# Altium PCB APD_part.PcbDoc
Units mm, origin at the board's own origin, x right, y up, seen from the top; angles counter-clockwise.
Board outline 50 x 65 mm, 4 copper layers (Top Layer, Layer 1, Layer 2, Bottom Layer), stack 0.603 mm thick; 76 components, 51 nets, 248 pads, 93 vias.
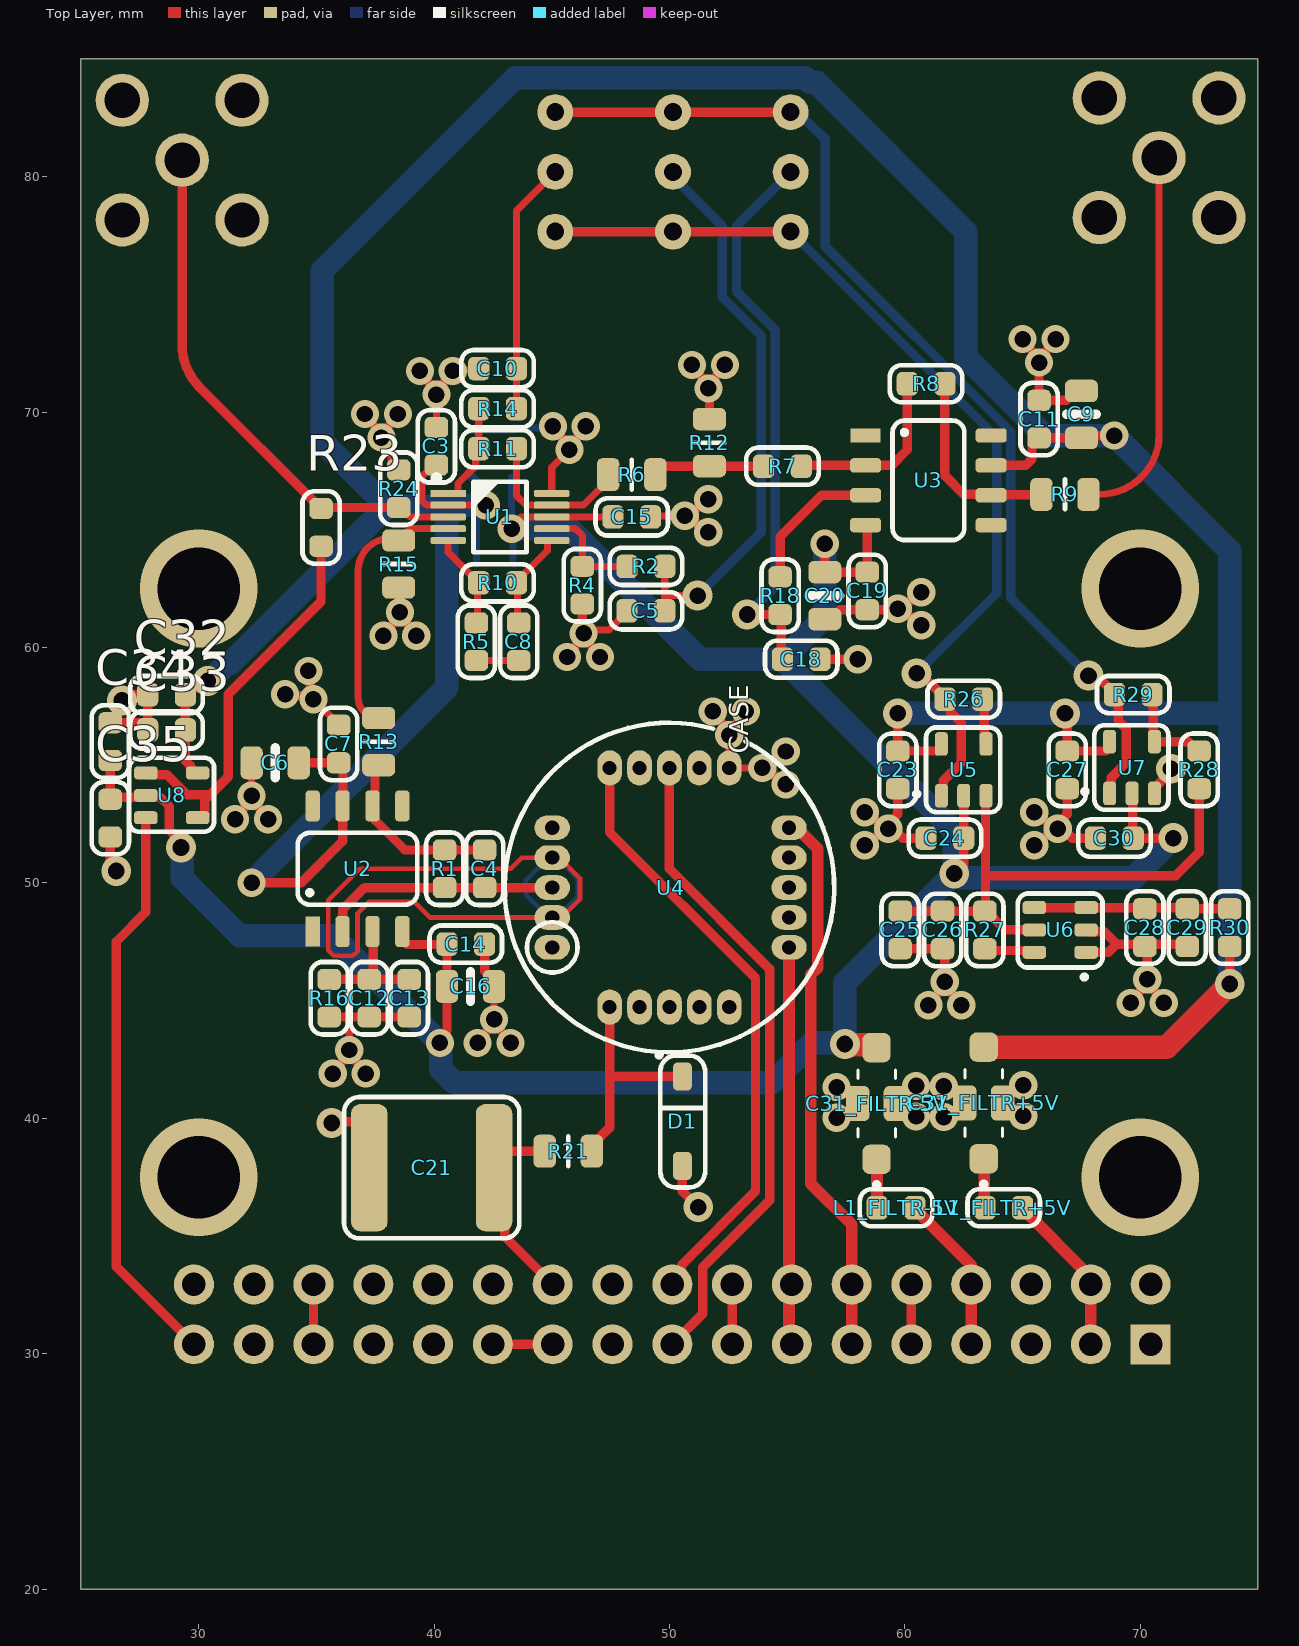
[diagram p0: Top Layer view]
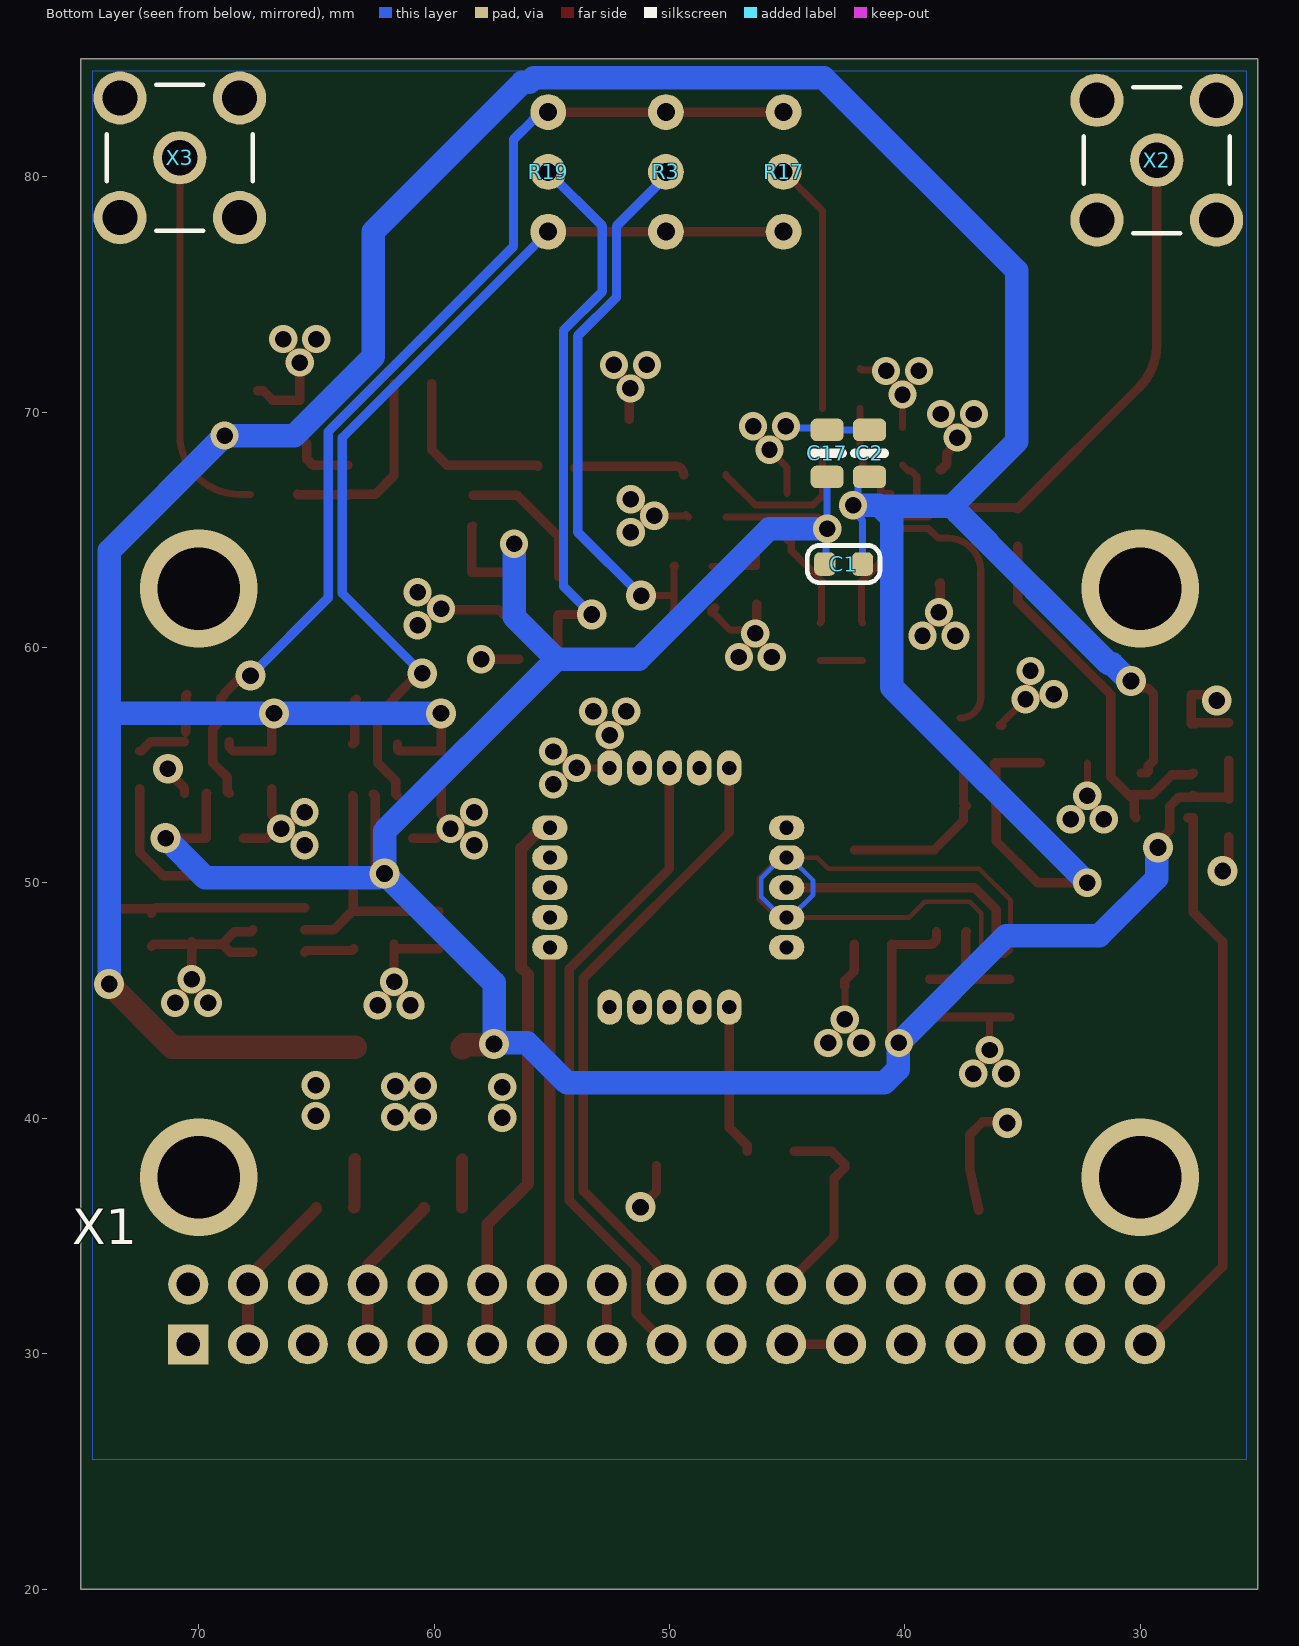
[diagram p1: Bottom Layer view, seen from below]
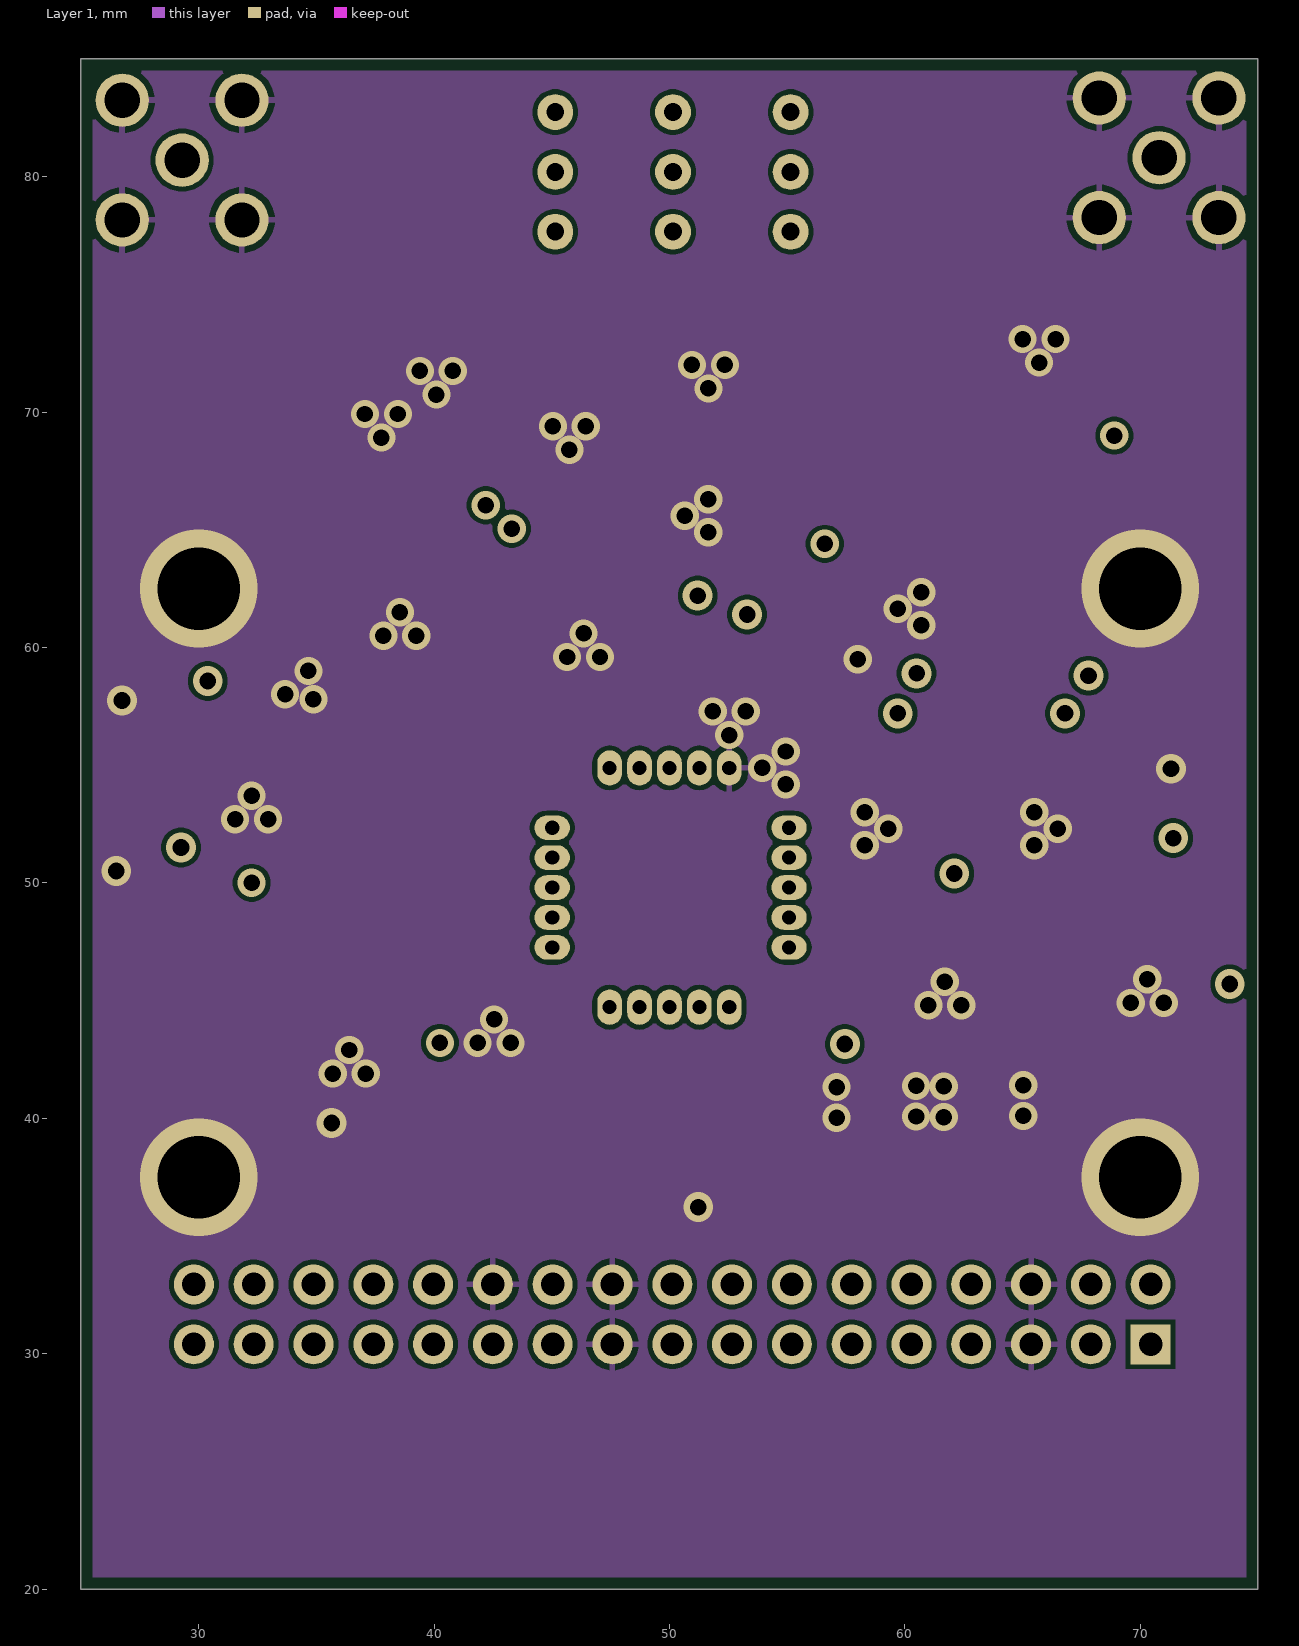
[diagram p2: Layer 1]
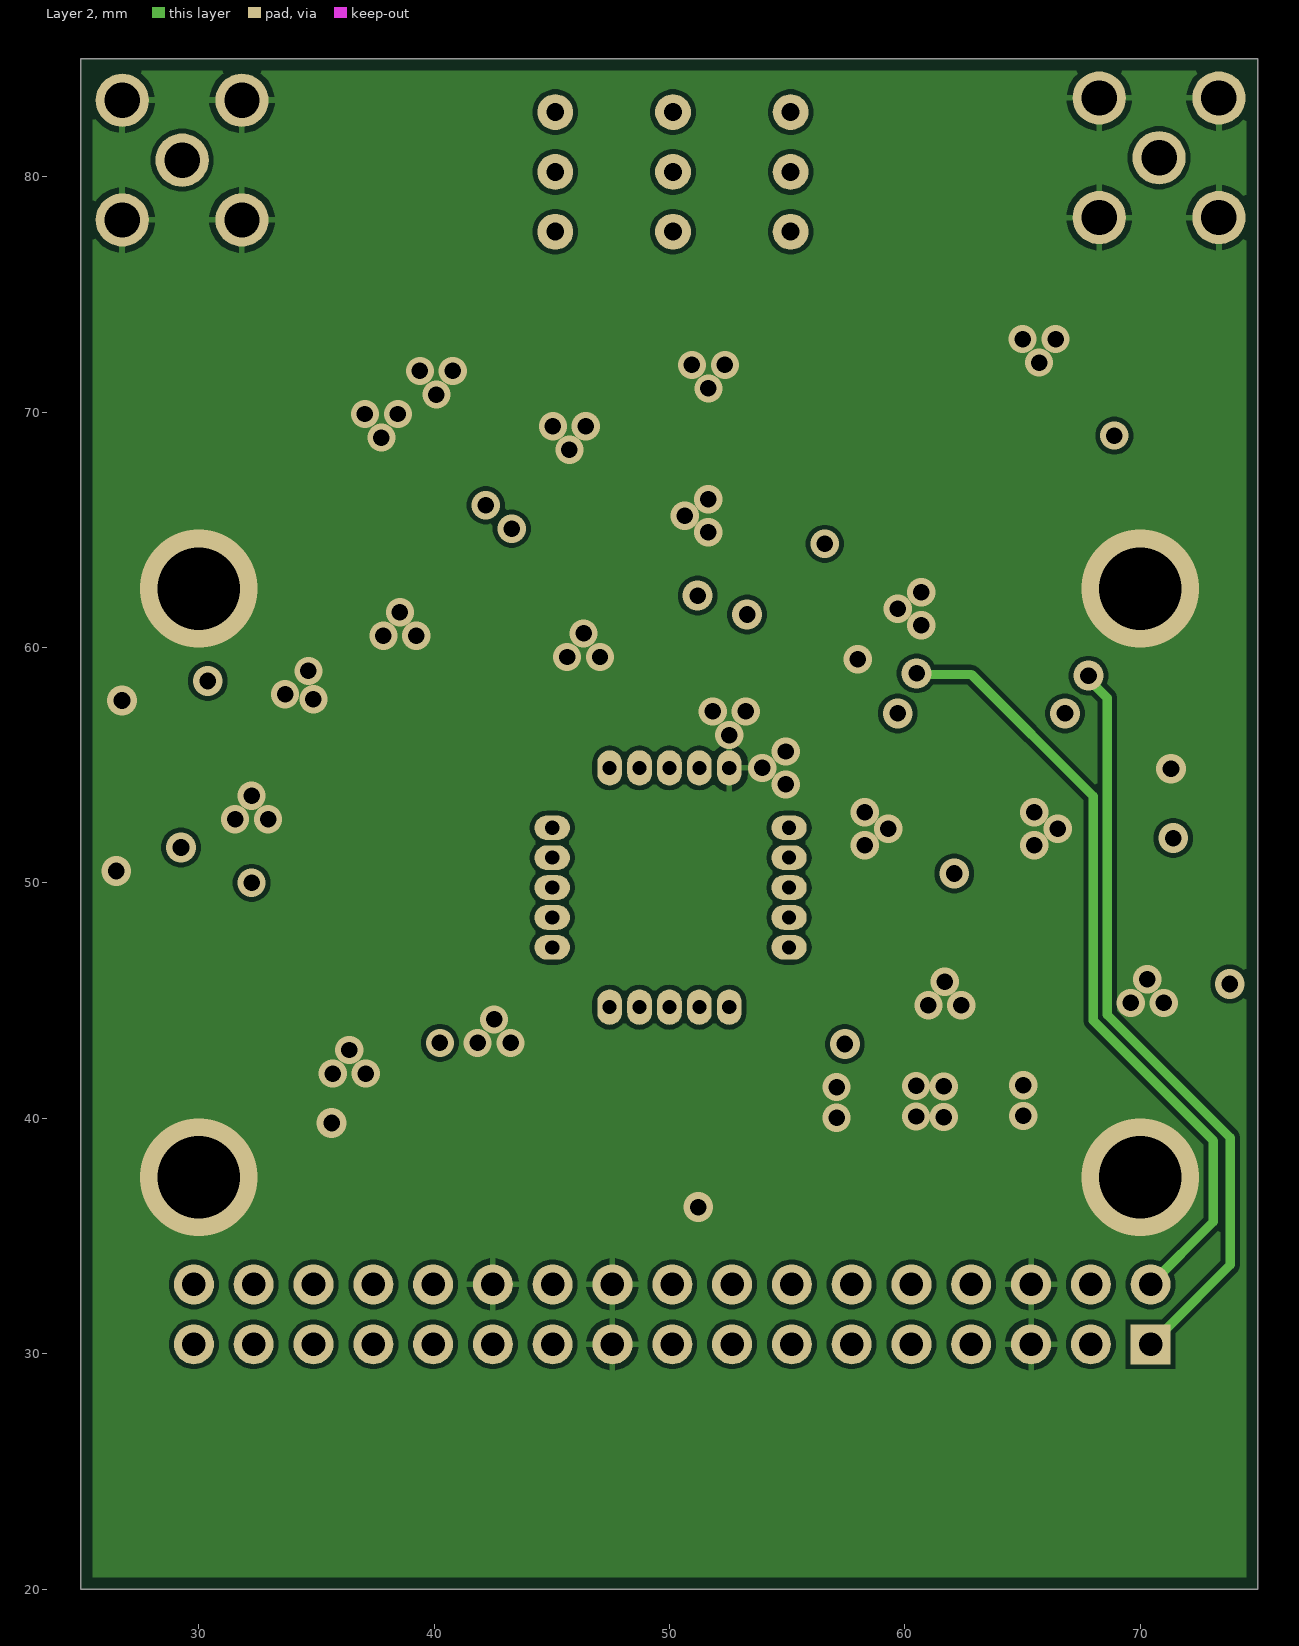
[diagram p3: Layer 2]
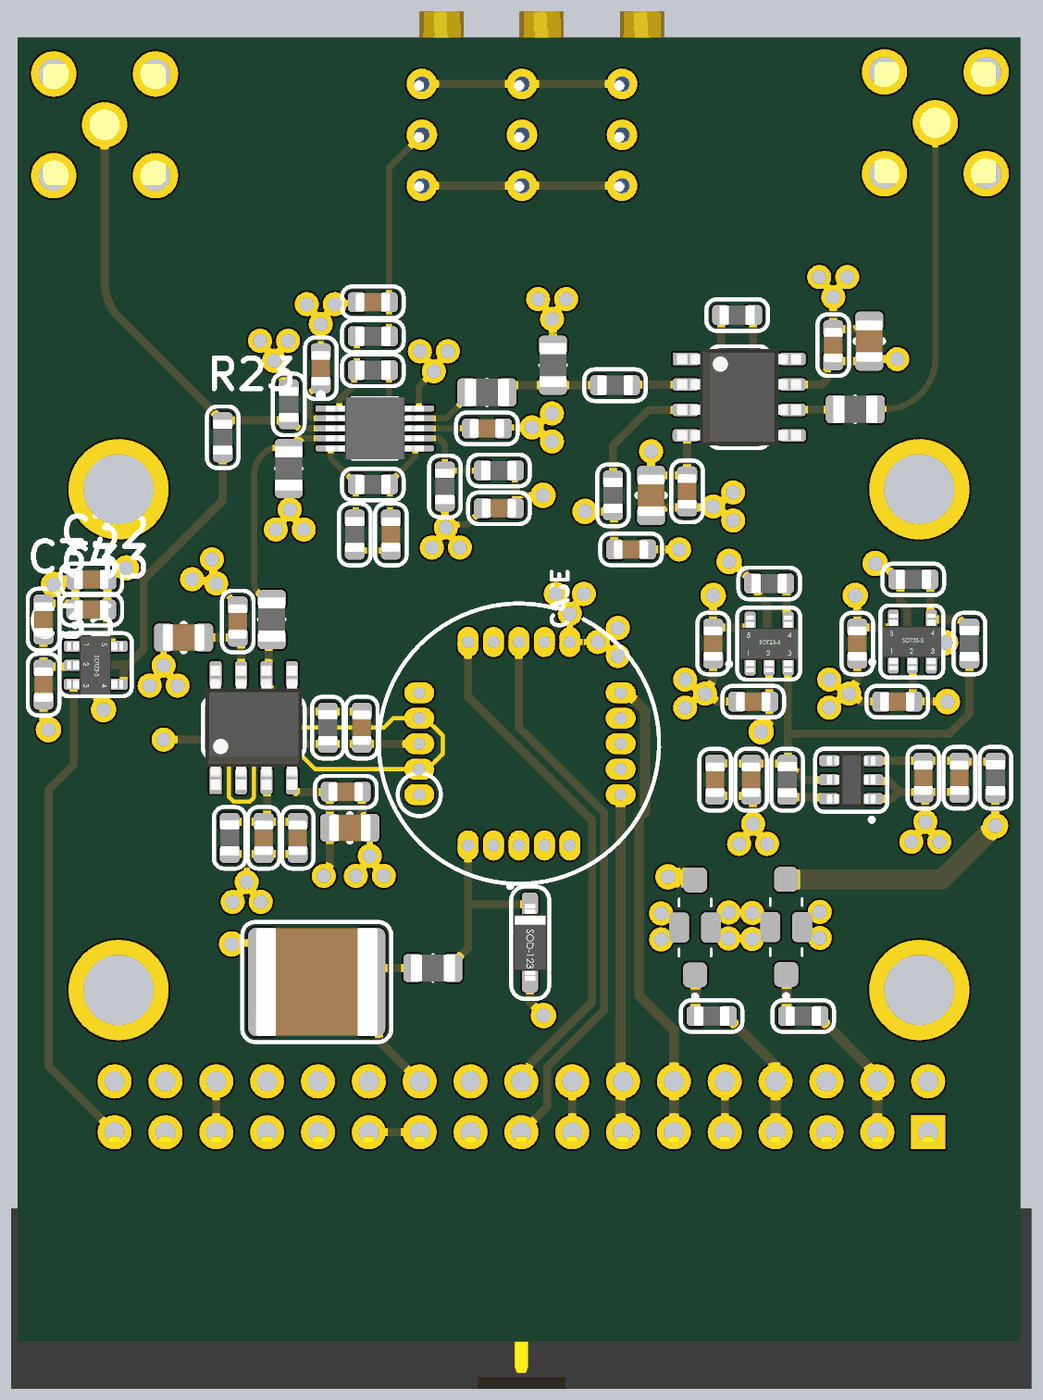
[diagram p4: 3D render of the assembled board from above, using the file's embedded part models]
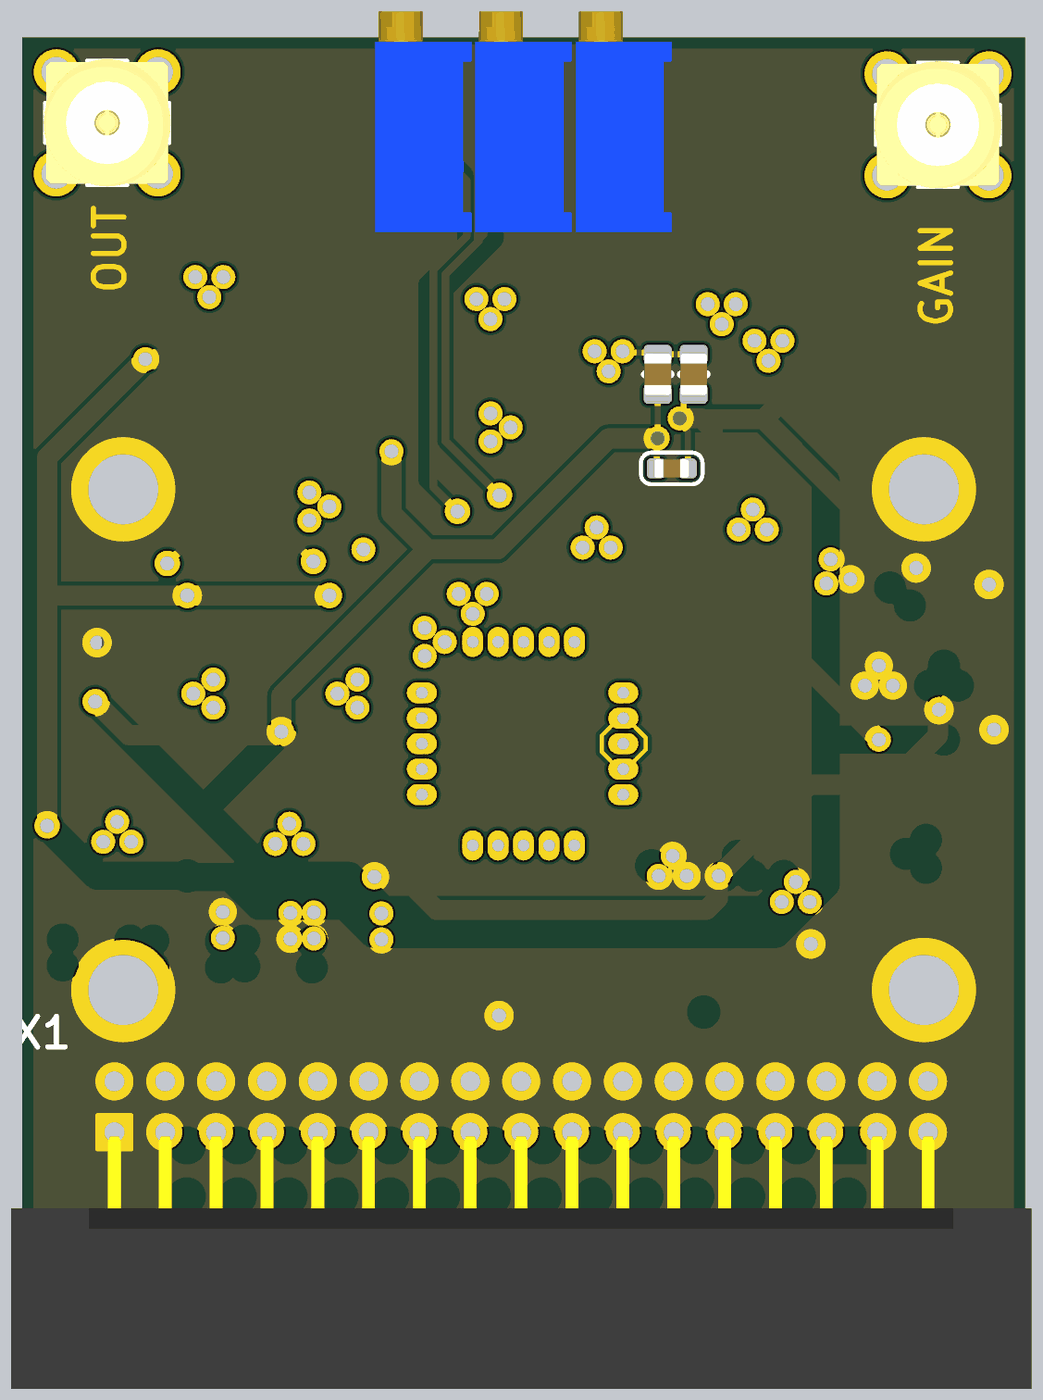
[diagram p5: 3D render of the assembled board from below, using the file's embedded part models]

## Layer stack, top to bottom
Top Solder: solder mask 0.0102, Solder Resist, Dk 3.5
Top Layer: signal copper 0.0356
Dielectric 2: prepreg 0.0711, PP-006, Dk 4.1
Layer 1: signal copper 0.035
Dielectric 1: dielectric 0.32, FR-4, Dk 4.8
Layer 2: signal copper 0.035
Dielectric 3: prepreg 0.0711, PP-006, Dk 4.1
Bottom Layer: signal copper 0.0356
Bottom Solder: solder mask 0.0102, Solder Resist, Dk 3.5

## Board outline
25,20 25,85 75,85 75,20

## Design rules (kind name [scope] priority, off if disabled: settings)
Clearance [All] p1: gap=0.2 ignorepadtopadclearanceinfootprint=FALSE
PlaneClearance [InNet('No Net') And OnLayer('Layer 2')] p1: clearance=0
PlaneConnect [All] p1: pad.planeconnectstyle=Relief pad.reliefexpansion=0.508 pad.reliefentries=4 pad.reliefconductorwidth=0.254 pad.reliefairgap=0.254 via.planeconnectstyle=Direct via.reliefexpansion=0.508 via.reliefentries=4 via.reliefconductorwidth=0.254 via.reliefairgap=0.254
PolygonConnect [All] p1: thpad.connectstyle=Relief thpad.reliefconductorwidth=0.254 thpad.reliefentries=4 thpad.polygonreliefangle="90 Angle" thpad.airgapwidth=0.254 smdpad.connectstyle=Relief smdpad.reliefconductorwidth=0.254 smdpad.reliefentries=4 smdpad.polygonreliefangle="90 Angle" smdpad.airgapwidth=0.254 via.connectstyle=Direct via.reliefconductorwidth=0.254 via.reliefentries=4 via.polygonreliefangle="90 Angle" via.airgapwidth=0.254
RoutingVias [All] p1: holewidth=0.711 width=1.27 viastyle="Through Hole" minholewidth=0.711 minwidth=1.27 maxholewidth=0.711 maxwidth=1.27
SolderMaskExpansion [All] p1: expansion=0.102 istentingtop=FALSE
Width [All] p1: maxlimit=5 minlimit=0.2 preferedwidth=0.3
28 further rules are at their usual default settings.

## Classes and differential pairs
component class BUF: C32 C33 C34 C35 U8
component class main: C21 D1 R21 R23 R24 U4 X1 X2 X3
component class AMP: C1 C2 C3 C4 C5 C6 C7 C8 C9 C10 C11 C12 C13 C14 C15 C16 C17 C18 C19 C20 R1 R2 R3 R4 R5 R6 R7 R8 R9 R10 R11 R12 R13 R14 R15 R16 R17 R18 R19 U1 U2 U3
channel class supply_filter: FILTR+5V FILTR-5V
component class REF: C23 C24 C25 C26 C27 C28 C29 C30 R26 R27 R28 R29 R30 U5 U6 U7
component class FILTR-5V: C31_FILTR-5V L1_FILTR-5V
component class FILTR+5V: C31_FILTR+5V L1_FILTR+5V

## Components (designator, comment, footprint, x,y, rotation, side; value= is the part's Value field where it differs from the comment)
C1 "CX0603MRX7R6BB104" CAP_0603 42.6,63.544 r0 bottom
C2 "2.2u" CAP_0805 41.5,68.244 r270 bottom
C3 "100n" CAP_0603 40.1,68.544 r270 top
C4 "0.5p" CAP_0603 42.15,50.6 r90 top
C5 "100n" CAP_0603 49,61.556 r180 top
C6 "6.8u" CAP_0805 33.25,55.1 r180 top
C7 "100n" CAP_0603 35.95,55.9 r90 top
C8 "15p" CAP_0603 43.6,60.244 r270 top
C9 "6.8u" CAP_0805 67.5,69.9 r90 top
C10 "100n" CAP_0603 42.7,71.844 r180 top
C11 "100n" CAP_0603 65.7,69.7 r90 top
C12 "100n" CAP_0603 37.25,45.1 r90 top
C13 "100p" CAP_0603 38.95,45.1 r90 top
C14 "100n" CAP_0603 41.35,47.4 r0 top
C15 "100n" CAP_0603 48.4,65.544 r180 top
C16 "6.8u" CAP_0805 41.55,45.6 r0 top
C17 "2.2u" CAP_0805 43.3,68.244 r270 bottom
C18 "100n" CAP_0603 55.6,59.5 r0 top
C19 "100n" CAP_0603 58.4,62.4 r270 top
C20 "6.8u" CAP_0805 56.6,62.2 r270 top
C21 "1206 100n 630V" CAP_2220 39.9,37.9 r180 top
C23 "100n" CAP_0603 59.7,54.8 r270 top
C24 "100n" CAP_0603 61.7,51.9 r180 top
C25 "1u" CAP_0603 59.8,48 r90 top
C26 "100n" CAP_0603 61.6,48 r90 top
C27 "100n" CAP_0603 66.9,54.8 r270 top
C28 "100n" CAP_0603 70.2,48.1 r90 top
C29 "2.2u" CAP_0603 72,48.1 r90 top
C30 "100n" CAP_0603 68.9,51.9 r180 top
C31_FILTR+5V "NFM41PC155B1E3L" FIL_NFM41PC155B1E3L 63.35,40.65 r90 top (schematic designator C31)
C31_FILTR-5V "NFM41PC155B1E3L" FIL_NFM41PC155B1E3L 58.8,40.625 r90 top (schematic designator C31)
C32 "1u" CAP_0603 28.637,57.994 r180 top
C33 "100n" CAP_0603 28.637,56.494 r180 top
C34 "100n" CAP_0603 26.25,56 r90 top
C35 "1u" CAP_0603 26.25,52.75 r270 top
D1 "P4SMA400A" SOD-123 50.55,39.875 r90 top
L1_FILTR+5V "BLM18SG700TN1D" RES_0603 64.2,36.2 r0 top (schematic designator L1)
L1_FILTR-5V "BLM18SG700TN1D" RES_0603 59.625,36.2 r0 top (schematic designator L1)
R1 "10k" RES_0603 40.45,50.6 r90 top
R2 "3.9k" RES_0603 49,63.444 r180 top
R3 "3296X" 3296X 50.15,80.2 r90 bottom
R4 "51" RES_0603 46.3,62.644 r90 top
R5 "510" RES_0603 41.8,60.244 r90 top
R6 "51" RES_0805 48.4,67.344 r0 top
R7 "390" RES_0603 54.8,67.7 r0 top
R8 "390" RES_0603 60.9,71.2 r0 top
R9 "51" RES_0805 66.8,66.5 r0 top
R10 "510" RES_0603 42.7,62.744 r180 top
R11 "510" RES_0603 42.7,68.444 r0 top
R12 "51" RES_0805 51.7,68.7 r270 top
R13 "51" RES_0805 37.65,56 r90 top
R14 "3.9k" RES_0603 42.7,70.144 r180 top
R15 "51" RES_0805 38.5,63.544 r90 top
R16 "10k" RES_0603 35.55,45.1 r90 top
R17 "3296X" 3296X 45.15,80.2 r90 bottom
R18 "20k" RES_0603 54.7,62.2 r90 top
R19 "3296X" 3296X 55.15,80.2 r90 bottom
R21 "10K" RES_0805 45.7,38.6 r180 top
R23 "51" RES_0603 35.2,65.1 r90 top
R24 "51" RES_0603 38.5,66.744 r270 top
R26 "10k" RES_0603 62.5,57.8 r180 top
R27 "1k" RES_0603 63.4,48 r90 top
R28 "10k" RES_0603 72.5,54.8 r90 top
R29 "10k" RES_0603 69.7,58 r180 top
R30 "1k" RES_0603 73.8,48.1 r270 top
U1 "VCA824IDGS" VSSOP10 42.8,65.544 r0 top
U2 "OPA847" SO8-150 36.75,50.6 r90 top
U3 "OPA656U" SO8-150 61,67.1 r0 top
U4 "C30659" C30659 50,49.8 r90 top
U5 "OPA188AIDBV" sot235 62.5,54.8 r0 top
U6 "REF3225" SOT236 66.6,48 r90 top
U7 "OPA188AIDBV" sot235 69.65,54.9 r0 top
U8 "AD8065ART" sot235 28.857,53.718 r270 top
X1 "?" BH-34 70.44,32.94 r180 bottom
X2 "Model" SMA_V 29.3,80.7 r180 bottom
X3 "Model" SMA_V 70.8,80.8 r180 bottom

## Footprints (in the part's own frame and the unit in brackets; to place one, negate y for a bottom-side part, rotate by r counter-clockwise, add the part's x,y. Pads: shape width x height; smd on the part's side, far side on the other; paste and mask are expansions set on the pad)
3296X [mil] "Потенциометр"
  round 60 hole 30: 1(-100,0) 2(0,0) 3(100,0)
  body extent -192,-100 242,89, height 395
BH-34 [mm]
  rect 1.7x1.7 hole 1: 1(0,-2.54)
  round 1.7 hole 1: 2(0,0) 3(2.54,-2.54) 4(2.54,0) 5(5.08,-2.54) 6(5.08,0) 7(7.62,-2.54) 8(7.62,0) 9(10.16,-2.54) 10(10.16,0) 11(12.7,-2.54) 12(12.7,0) 13(15.24,-2.54) 14(15.24,0) 15(17.78,-2.54) 16(17.78,0) 17(20.32,-2.54) 18(20.32,0) 19(22.86,-2.54) 20(22.86,0) 21(25.4,-2.54) 22(25.4,0) 23(27.94,-2.54) 24(27.94,0) 25(30.48,-2.54) 26(30.48,0) 27(33.02,-2.54) 28(33.02,0) 29(35.56,-2.54) 30(35.56,0) 31(38.1,-2.54) 32(38.1,0) 33(40.64,-2.54) 34(40.64,0)
  body extent -5.17,-15.35 45.81,-2.75, height 8.67
C30659 [mm]
  oval 1.5x1.05 hole 0.6: 0(-5.08,-1.27) 0(-5.08,1.27) 0(5.08,-1.27) 0(5.08,1.27) 4(5.08,2.54) 5(5.08,0) 6(5.08,-2.54) 10(-5.08,-2.54) 11(-5.08,0) 12(-5.08,2.54)
  oval 1.05x1.5 hole 0.6: 0(-1.27,4.98) 0(-1.27,-5.08) 0(1.27,4.98) 0(1.27,-5.08) 1(-2.54,4.98) 2(0,4.98) 3(2.54,4.98) 7(2.54,-5.08) 8(0,-5.08) 9(-2.54,-5.08)
  silkscreen extent -7,-7 7,7, body extent -7.62,-7.62 7.62,7.62, height 12
CAP_0603 [mm] "Chip Resistor, EIA 0603, Metric 1608, Body 1.6x0.8mm, IPC Medium Density"
  rrect50% 0.9x1 smd: 1(-0.8,0) 2(0.8,0)
  silkscreen extent -1.54,-0.79 1.54,0.79, body extent -0.88,-0.48 0.87,0.47, height 0.85
CAP_0805 [mm] "Chip Resistor, EIA 0805, Metric 2012, Body 2.0x1.2mm, IPC Medium Density"
  rrect50% 0.95x1.4 smd: 1(-1,0) 2(1,0)
  silkscreen extent 0,-0.64 0,0.64, body extent -1.05,-0.68 1.05,0.67, height 0.9
CAP_2220 [mm] "Chip Capacitor, 2-Leads, Body 5.7x5.0mm, IPC Medium Density"
  rrect50% 1.55x5.4 smd: 1(-2.65,0) 2(2.65,0)
  silkscreen extent -3.73,-3 3.72,3, body extent -3.05,-2.7 3.05,2.7, height 2
FIL_NFM41PC155B1E3L [mm]
  rrect50% 1.25x1.2 smd: 1(-2.375,0) 3(2.375,0)
  rrect50% 1.5x1 smd: 2(0,0.8) 2(0,-0.8)
  silkscreen extent -3.55,-0.8 1.43,0.8
RES_0603 [mm] "Chip Resistor, EIA 0603, Metric 1608, Body 1.6x0.8mm, IPC Medium Density"
  rrect50% 0.9x1 smd: 1(-0.8,0) 2(0.8,0)
  silkscreen extent -1.54,-0.79 1.54,0.79, body extent -0.87,-0.47 0.88,0.48, height 0.55
RES_0805 [mm] "Chip Resistor, EIA 0805, Metric 2012, Body 2.0x1.2mm, IPC Medium Density"
  rrect50% 0.95x1.4 smd: 1(-1,0) 2(1,0)
  silkscreen extent 0,-0.64 0,0.64, body extent -1.1,-0.67 1.1,0.68, height 0.6
SMA_V [mm]
  round 2.262 hole 1.5: G(-2.54,-2.54) G(-2.54,2.54) G(2.54,-2.54) G(2.54,2.54) S(0,0)
  silkscreen extent -3.1,-3.1 3.1,3.1, body extent -3.17,-3.17 3.18,3.17, height 9.6
SO8-150 [mil]
  rect 50x24 smd mask+4: 1(-105,75)
  rrect50% 52x24 smd mask+4: 2(-105,25) 3(-105,-25) 4(-105,-75) 5(105,-75) 6(105,-25) 7(105,25) 8(105,75)
  silkscreen extent -60,-100 60,100, body extent -122,-95 122,95, height 67
SOD-123 [mm] "SOD-123; 2 Leads; Body 2.7 x 1.6 mm, (LxW)"
  rrect50% 1.2x0.8 smd: 1(-1.9,0) 2(1.9,0)
  silkscreen extent -2.82,-0.97 2.92,1.09, body extent -1.92,-0.86 1.93,0.84, height 1.43
sot235 [mm] "SOT23, 5-Leads, Body 2.9x1.3mm, Pitch 0.95mm, Lead Span 2.5mm"
  rrect50% 0.55x1 smd: 1(-0.95,-1.1) 2(0,-1.1) 3(0.95,-1.1) 4(0.95,1.1) 5(-0.95,1.1)
  silkscreen extent -2.1,-1.8 1.55,1.8, body extent -1.45,-1.42 1.45,1.38, height 1.09
SOT236 [mm] "SOT23, 6-Leads, Body 2.9x1.3mm, Pitch 0.95mm, Lead Span 2.5mm"
  rrect50% 0.55x1 smd: 1(-0.95,-1.1) 2(0,-1.1) 3(0.95,-1.1) 4(0.95,1.1) 5(0,1.1) 6(-0.95,1.1)
  silkscreen extent -2.1,-1.8 1.55,1.8, body extent -1.4,-1.22 1.4,1.21, height 1.09
VSSOP10 [mm] "TSSOP, 10-Leads, Body 3x3mm (max), Pitch 0.50mm, IPC Medium Density"
  rect 1.5x0.3 smd: 1(-2.2,1)
  rrect50% 1.5x0.3 smd: 2(-2.2,0.5) 3(-2.2,0) 4(-2.2,-0.5) 5(-2.2,-1) 6(2.2,-1) 7(2.2,-0.5) 8(2.2,0) 9(2.2,0.5) 10(2.2,1)
  silkscreen extent -2.82,-1.5 1.12,1.77, body extent -2.45,-1.55 2.45,1.55, height 1.1

## Part data
C1 C2 C3 C4 C5 C6 C7 C8 C9 C10 C11 C12 C13 C14 C15 C16 C17 C18 C19 C20 C21 C23 C24 C25 C26 C27 C28 C29 C30 C32 C33 C34 C35: library part Capacitor, "Конденсатор"
C31_FILTR+5V C31_FILTR-5V: library part Capacity_filtr, "Емкостной фильтр проходной"
D1: library part SMFxxA, "Диод защитный", ValueBOM=-, HelpURL=C:\Datasheets\SMF.pdf, MarkPCB=-, ValueSCH=-
L1_FILTR+5V L1_FILTR-5V: library part FERRITE_BEAD, "Дроссель ЭМП", ValueBOM=SDR0403-101k, ValueSCH=100u, HelpURL=C:\Datasheets\SRD0403.pdf, MarkPCB=101
R1 R16 R26 R28 R29: library part Resisitor, "Резистор", ValueBOM="0805 10k 0.125", MarkPCB=103, ValueSCH=10k
R2 R4 R5 R6 R7 R8 R9 R10 R11 R12 R13 R14 R15 R18 R21 R23 R24: library part Resisitor, "Резистор", ValueBOM="0805 10k 0.125", ValueSCH=10k, MarkPCB=103
R3 R17 R19: "Резистор подстроечный", HelpURL=C:\Datasheets\.pdf, ValueBOM=3296X, ValueSCH=3296X
R27 R30: library part Resisitor, "Резистор"
U1: library part "VCA824 (VSOP10)"
U2: "Операционный усилитель", HelpURL=C:\Datasheets\OPA847.pdf, MarkPCB=OPA847, ValueBOM=OPA847, ValueSCH=OPA847
U3: library part OPA657, "Операционный усилитель", HelpURL=C:\Datasheets\OPA657.pdf, MarkPCB=OPA657, ValueBOM=OPA657, ValueSCH=OPA657
U4: "Модуль с ЛФД", HelpURL=C:\Datasheets\C30659.pdf, MarkPCB=C30659, ValueBOM=C30659, ValueSCH=C30659
U5 U7 U8: library part "OPAMP SOT235", "Операционный усилитель"
U6: library part REF32xx, "Источник опорного напряжения", HelpURL=C:\Datasheets\REF32xx.pdf, ValueBOM=REF32xx, ValueSCH=REF32xx
X1: library part "Connector 17x2", ValueSCH=Model
X2 X3: library part "Connector 2", Name=Назначение, Net1=SIGNAL, Net2=GROUND, ValueSCH=Model

## Via types
v1: diameter 1.2, hole 0.7, Top Layer to Bottom Layer, 72 vias
v2: diameter 1.27, hole 0.711, Top Layer to Bottom Layer, 17 vias
v3: diameter 5, hole 3.5, Top Layer to Bottom Layer, 4 vias

## Nets (pads, with @x,y where several pads share a name; then routed paths per layer and width w, separated by ;. In a path a pad name is that pad's centre, name@x,y a point inside that pad or via, vN(x,y) a via of type N, cw(c..) or ccw(c..) an arc to the next point about the centre after c; other vN are vias at no path point)
!SHDN: X1.31
+2.5VREF: R3.1 R17.1 R19.1 R26.2 U5.1 X1.2 | length 73.8
  Top Layer w0.4: R17.1@44.9,77.66 49.9,77.66 R19.1@54.9,77.66 ; v2(60.5,58.9) 60.65,58.9 61.7,57.85 R26.2 61.935,57.565 61.935,57.265 62.4,56.8 62.4,55.1 61.625,54.325 61.625,53.775 U5.1
  Layer 2 w0.4: v2(60.5,58.9) 60.55,58.85 62.825,58.85 68,53.675 68,44.151 73.1,39.051 73.1,35.6 X1.2
  Bottom Layer w0.4: R19.1 63.9,68.91 63.9,62.3 v2(60.5,58.9)
+3.3V: X1.9 X1.10 | length 2.5
  Top Layer w0.4: X1.9 X1.10
+5V: L1_FILTR+5V.2 X1.3 X1.4 | length 7
  Top Layer w0.5: L1_FILTR+5V.2 65,36.15 67.9,33.25 X1.4 X1.3
+5V_A: C1.1 C2.2 C3.2 C6.1 C7.1 C9.1 C11.1 C23.1 C27.1 C31_FILTR+5V.3 C32.1 C33.1 R30.2 U1.2 U2.7 U3.7 U5.5 U7.5 U8.5 | length 182.2
  Top Layer w0.3: C3.2 39.846,67.49 39.717,67.49 39.495,67.268 39.495,66.219 39.671,66.044 U1.2 v1@41.8,66.044
  Top Layer w0.4: U8.5 29.732,54.668 29.657,54.743 29.657,54.968 29.437,55.188 C33.1 C32.1 29.437,58.031 29.685,58.279 v2@30.029,58.279 ; v1(32.25,50) 34.35,50 36.115,51.765 U2.7 36.132,53.285 36.132,55.082 36.15,55.1 C7.1@36.2,55.05 ; C6.1 C7.1 ; v2(59.7,57.2) C23.1 61.475,55.6 61.55,55.675 U5.5 ; U3.7 65.135,67.735 65.4,68 65.4,68.6 65.415,68.615 65.415,68.652 65.664,68.9 C11.1 C9.1 67.6,69 v1(68.9,69) ; v2(66.8,57.2) cw(c66.8,57.1) 66.9,57.1 C27.1 68.525,55.6 68.7,55.775 U7.5 ; v2(73.8,45.7) R30.2
  Top Layer w1: C31_FILTR+5V.3 71.125,43.025 v2(73.8,45.7)
  Bottom Layer w0.3: C2.2 41.678,67.244 41.996,66.925 v1@41.996,66.491 ; C1.1 41.8,65.4 42.2,65.8 v1(42.2,66.044)
  Bottom Layer w1: v2(30.389,58.574) 30.462,58.574 31.188,59.3 31.325,59.3 37.75,65.725 ; v1(32.25,50) 40.55,58.3 40.55,65.494 41.056,66 ; 36.5,64.5 38,66 ; v1(42.2,66.044) 41.1,66.044 41.056,66 ; v2(59.7,57.2) v2(66.8,57.2) 73.7,57.2 73.8,57.1 ; v2(73.8,45.7) 73.8,57.1 ; 38,66 35.25,68.75 35.25,76 43.452,84.202 55.756,84.202 55.958,84 56.25,84 62.591,77.659 62.591,72.341 65.931,69 v1(68.9,69) 73.8,64.1 73.8,57.1 ; 38,66 41.056,66
+9_36V: X1.29 X1.30 | length 2.5
  Top Layer w0.4: X1.29 X1.30
-2.5VREF: R3.3 R17.3 R19.3 R29.2 U7.1 X1.1 | length 77.8
  Top Layer w0.4: R17.3@44.9,82.74 49.9,82.74 R19.3@54.9,82.74 ; v2(67.8,58.8) 67.809,58.809 68.141,58.809 68.9,58.05 R29.2 69.06,57.84 69.06,56.9 69.4,56.56 69.4,55.1 68.775,54.475 68.775,53.875 U7.1
  Layer 2 w0.4: v2(67.8,58.8) 67.8,58.653 68.6,57.853 68.6,44.4 73.825,39.175 73.825,33.775 71.1,31.05 71.09,31.05 X1.1
  Bottom Layer w0.4: R19.3 55.454,82.74 56.235,81.959 56.241,81.959 56.625,81.575 56.625,77.034 64.5,69.159 64.5,68.909 64.5,62.1 v2(67.8,58.8)
-5V: L1_FILTR-5V.2 X1.7 X1.8 | length 6.8
  Top Layer w0.5: L1_FILTR-5V.2 60.425,36.15 62.82,33.755 X1.8 X1.7
-5V_A: C1.2 C14.1 C15.2 C16.1 C17.2 C19.1 C20.1 C24.1 C30.1 C31_FILTR-5V.3 C34.1 C35.1 U1.8 U2.4 U3.4 U5.2 U7.2 U8.2 | length 119.1
  Top Layer w0.3: v1@43.5,65.344 43.7,65.544 U1.8 C15.2 ; U3.4 U3.4@58.4,65.128
  Top Layer w0.4: C34.1 C35.1 26.343,53.643 27.682,53.643 U8.2 27.832,53.643 28.357,53.643 28.75,53.25 28.75,52.25 29.25,51.75 v2(29.25,51.5) ; U2.4 38.655,47.577 38.853,47.38 40.53,47.38 C14.1 C16.1 v1@40.55,43.716 ; v1(56.6,64.4) C20.1 C19.1 U3.4@58.4,65.128 ; v2(62.1,50.4) 62.5,50.8 C24.1 U5.2 U5.2@62.575,53.775 ; U7.2 69.675,53.775 69.675,51.925 C30.1 v2(71.4,51.9)
  Top Layer w1: v2(57.45,43.15) 57.475,43.125 58.675,43.125 58.7,43.125 58.8,43.025 C31_FILTR-5V.3
  Bottom Layer w0.3: C17.2 v1(43.3,65.044) 43.35,64.994 43.35,63.594 C1.2
  Bottom Layer w1: v2(29.25,51.5) 29.302,51.448 29.302,50.198 31.75,47.75 35.7,47.75 v1(40.25,43.2) 40.288,43.162 40.288,42.086 40.874,41.5 54.35,41.5 56.05,43.2 57.4,43.2 v2(57.45,43.15) ; v1(43.3,65.044) 45.756,65.044 51.3,59.5 54.8,59.5 ; v1(56.6,64.4) 56.6,61.3 54.8,59.5 ; v2@57.45,43.2 57.45,45.75 v2(62.1,50.4) ; v2(71.4,51.9) 69.725,50.225 62.348,50.225 62.173,50.4 v2(62.1,50.4) ; 54.8,59.5 62.1,52.2 v2(62.1,50.4)
EXT_GAIN: U8.3 X1.33 | length 24.5
  Top Layer w0.4: U8.3@27.982,52.768 U8.3 27.757,48.757 26.5,47.5 26.5,33.7 X1.33
GAIN: R23.2 R24.2 U1.3 X2.S | length 22.7
  Top Layer w0.3: R23.2 cw(c35.305,65.795) R23.2@35.305,65.944 ; R24.2 38.591,65.944 38.991,65.544 U1.3
  Top Layer w0.4: X2.S 29.3,72.852 ccw(c31.84,72.852) 30.044,71.056 R23.2 ; R23.2@35.305,65.944 R24.2
GND: C2.1 C3.1 C5.2 C6.2 C7.2 C9.2 C10.2 C11.2 C12.1 C13.1 C14.2 C15.1 C16.2 C17.1 C18.2 C19.2 C20.2 C21.2 C23.2 C24.2 C25.1 C26.1 C27.2 C28.1 C29.1 C30.2 C31_FILTR+5V.2 C31_FILTR-5V.2 C32.2 C33.2 C34.2 C35.2 D1.1 R4.1 R12.1 R15.1 R16.1 R24.1 U1.10 U4.6 U6.1 U6.2 U7.3 X1.5 X1.6 X1.19 X1.20 X1.24 X2.G X3.G | length 114.1
  Top Layer w0.3: v1@31.6,52.65 v1@31.65,52.7 ; v1(32.25,53.7) C6.2 ; v1@34.592,58.931 v1@34.592,59.002 ; v1(34.875,57.8) C7.2@35.865,56.81 ; v1@35.75,41.85 v1@35.8,41.9 ; v1(36.4,42.9) 36.4,44.3 ; C3.1 v1(40.1,70.744) ; v1@40.7,71.744 40.75,71.794 41.85,71.794 C10.2 ; v1@41.9,43.15 v1@41.95,43.2 ; v1(42.55,44.2) C16.2 ; U1.10 45,67.644 v1(45.75,68.394) v1@45.994,68.394 ; v1@46.503,60.747 47.427,60.747 C5.2@48.2,61.52 ; C15.1 C15.1@49.294,65.637 ; C15.1@49.247,65.59 v1(50.647,65.59) ; v1@51.647,64.99 v1@51.697,64.94 ; v1(52.54,56.28) U4.6 v1(53.94,54.88) ; v1@53.14,57.28 v1@53.19,57.33 ; v1@54.94,54.28 v1@54.99,54.23
  Top Layer w0.4: C35.2 26.25,50.75 v2(26.5,50.5) ; C34.2 27.567,56.8 27.617,56.75 27.837,56.75 C32.2 26.984,57.994 26.75,57.76 v2(26.75,57.75) ; v3@30.3,39.3 ccw(c30.3,39.4) v3@30.4,39.4 ; v1@31.65,52.9 v1@32.25,53.5 ; v1(32.25,53.7) v1@32.25,53.5 ; v1@32.85,52.7 32.85,52.9 v1@32.25,53.5 ; v1@33.744,58.083 33.885,57.941 v1@34.734,57.941 ; v1@34.734,58.79 v1@34.734,57.941 ; v1(34.875,57.8) v1@34.734,57.941 ; R16.1 C12.1 C13.1 ; v2(35.65,39.8) 35.7,39.85 36.689,39.85 37.25,39.289 C21.2 C21.2@36.862,36.1 ; v1@35.8,42.1 v1@36.4,42.7 ; C7.2@35.886,56.7 C7.2 ; v1(36.4,42.9) v1@36.4,42.7 ; v1@37,41.9 37,42.1 v1@36.4,42.7 ; v1@37.166,69.916 37.166,69.716 v1@37.766,69.116 ; v1@37.95,60.694 v1@38.55,61.294 ; v1@38.366,69.716 v1@37.766,69.116 ; R24.1 38.464,67.544 38.215,67.792 38.215,68.25 37.766,68.7 v1(37.766,68.916) v1@37.766,69.116 ; R15.1@38.55,62.694 38.5,62.744 38.5,61.544 v1(38.55,61.494) v1@38.55,61.294 ; v1@39.275,60.619 39.15,60.494 39.15,60.694 v1@38.55,61.294 ; v1@39.5,71.744 39.5,71.544 v1@40.1,70.944 ; v1(40.1,70.744) v1@40.1,70.944 ; v1@40.7,71.544 v1@40.1,70.944 ; v1@41.95,43.4 v1@42.55,44 ; C14.2 42.15,46.245 42.55,45.845 C16.2 ; v1(42.55,44.2) v1@42.55,44 ; v1@43.15,43.2 43.15,43.4 v1@42.55,44 ; v1@45.15,69.394 45.15,69.194 v1@45.75,68.594 ; v1@45.75,59.794 v1@46.35,60.394 ; v1(45.75,68.394) v1@45.75,68.594 ; R4.1 46.3,60.644 v1(46.35,60.594) ; v1@46.35,69.194 v1@45.75,68.594 ; v1@46.503,60.747 v1(46.35,60.594) ; v1@47.075,59.719 46.95,59.594 46.95,59.794 v1@46.35,60.394 ; C5.2@48.075,61.681 C5.2 C5.2@48.2,61.52 ; D1.1 50.55,36.9 v2(51.225,36.225) ; v1(50.647,65.59) v1@50.847,65.59 ; v1@51.056,72 51.056,71.8 v1@51.656,71.2 ; v1@51.447,64.99 v1@50.847,65.59 ; v1@51.647,66.19 51.447,66.19 v1@50.847,65.59 ; R12.1 51.7,70.956 ccw(c51.656,70.956) v1(51.656,71) v1@51.656,71.2 ; v1@51.94,57.28 51.94,57.08 v1@52.54,56.48 ; v1@52.256,71.8 v1@51.656,71.2 ; v1(52.54,56.28) v1@52.54,56.48 ; v1@53.14,57.08 v1@52.54,56.48 ; v1(53.94,54.88) v1@54.14,54.88 ; v1@54.74,54.28 v1@54.14,54.88 ; v1@54.94,55.48 54.74,55.48 v1@54.14,54.88 ; C18.2 v1(58,59.5) ; C20.2 56.845,61.2 57.245,61.6 C19.2 59.656,61.6 ccw(c59.656,61.644) v1(59.7,61.644) v1@59.9,61.644 ; v1@58.3,51.7 58.5,51.7 v1@59.1,52.3 ; v1@58.5,52.9 v1@59.1,52.3 ; C23.2 59.7,52.916 59.3,52.516 v1(59.3,52.3) ; C25.1 C26.1 ; v1@60.5,61.044 v1@59.9,61.644 ; v1@60.7,62.244 60.5,62.244 v1@59.9,61.644 ; C24.2 59.904,51.9 59.504,52.3 v1(59.3,52.3) ; v1@61.1,45 v1@61.7,45.6 ; C26.1@61.7,47.4 v1(61.7,45.8) v1@61.7,45.6 ; v1@62.3,44.8 62.3,45 v1@61.7,45.6 ; v1@65.1,73.1 65.1,72.9 v1@65.7,72.3 ; v1@65.5,51.7 65.7,51.7 v1@66.3,52.3 ; v1@65.7,52.9 v1@66.3,52.3 ; v1@66.3,72.9 v1@65.7,72.3 ; C27.2 66.9,52.916 66.5,52.516 v1(66.5,52.3) ; C9.2 67.255,70.9 66.855,70.5 C11.2 v1(65.7,72.1) v1@65.7,72.3 ; U6.1 68.65,47.05 69,47.4 ; U6.2 67.775,47.925 68.475,47.925 69,47.4 ; C30.2 67.104,51.9 66.704,52.3 v1(66.5,52.3) ; v1@69.7,45.1 v1@70.3,45.7 ; C28.1@70.3,47.5 v1(70.3,45.9) v1@70.3,45.7 ; U7.3 70.6,54.025 71.2,54.625 71.2,54.7 71.306,54.806 v2(71.306,54.846) ; v1@70.9,44.9 70.9,45.1 v1@70.3,45.7 ; C29.1 71.9,47.4 69,47.4 ; v1@46.35,60.394 v1(46.35,60.594) ; v1@59.1,52.3 v1(59.3,52.3) ; v1@66.3,52.3 v1(66.5,52.3)
  Bottom Layer w0.3: C2.1 C17.1 43.375,69.319 44.975,69.319 v1(45.05,69.394) ; v1@45.075,69.319 v1@45.15,69.394 ; v1@50.981,71.925 v1@51.056,72 ; v1@60.625,62.319 v1@60.7,62.244
  other v1: 57.1,40.025 61.65,40.05 60.475,40.075 65.025,40.1 57.1,41.325 61.65,41.35 60.475,41.375 65.025,41.4 35.7,41.9 37.1,41.9 41.85,43.2 43.25,43.2 61,44.8 62.4,44.8 69.6,44.9 71,44.9 58.3,51.6 65.5,51.6 31.55,52.7 32.95,52.7 58.3,53 65.5,53 54.94,54.18 54.94,55.58 51.84,57.28 53.24,57.28 33.673,58.012 34.663,59.002 45.65,59.594 47.05,59.594 37.85,60.494 39.25,60.494 60.7,60.944 60.7,62.344 51.647,64.89 51.647,66.29 46.45,69.394 37.066,69.916 38.466,69.916 39.4,71.744 40.8,71.744 50.956,72 52.356,72 65,73.1 66.4,73.1
  other v3: 30,37.5 70,37.5 30,62.5 70,62.5
GND_IN: X1.15 X1.16 | length 2.5
  Top Layer w0.4: X1.15 X1.16
HV: C21.1 R21.2 X1.22 | length 8.5
  Top Layer w0.4: R21.2 43.111,38.6 42.55,38.039 C21.1 43.009,37.441 43.009,34.971 X1.22
HV_COVER: X1.21 X1.23 | length 2.5
  Top Layer w0.4: X1.23 X1.21
NetC4_1: C4.1 R1.1 U2.2 U4.2 | length 10.2
  Top Layer w0.4: U2.2 36.115,48.865 37.05,49.8 U4.2
NetC4_2: C4.2 R1.2 R13.1 U2.6 | length 7.7
  Top Layer w0.381: R13.1 37.499,54.849 37.499,53.381 U2.6 37.499,53.153 37.499,52.651 38.75,51.4 R1.2 C4.2
NetC5_1: C5.1 R2.1 R3.2 | length 24
  Top Layer w0.3: C5.1 R2.1 ; 49.8,62.2 v2(51.2,62.2)
  Bottom Layer w0.4: R3.2 50.15,80 52.25,77.9 52.25,74.875 53.9,73.225 53.9,64.9 v2(51.2,62.2)
NetC8_1: C8.1 R10.1 U1.6 | length 4.3
  Top Layer w0.3: C8.1 43.55,61.094 43.55,62.694 R10.1 43.5,62.794 44.826,64.119 44.826,64.544 U1.6
NetC8_2: C8.2 R5.1 | length 1.8
  Top Layer w0.3: R5.1 C8.2
NetC10_1: C10.1 R14.1 R17.2 | length 10.7
  Top Layer w0.3: R14.1 C10.1 43.5,78.55 R17.2
NetC12_2: C12.2 C13.2 R16.2 U2.3 | length 5.3
  Top Layer w0.4: R16.2 C12.2 C13.2 ; U2.3 37.417,47.901 37.417,46.132 C12.2@37.45,46.1
NetC18_1: C18.1 R18.1 R19.2 | length 24.3
  Top Layer w0.4: v2(53.3,61.4) R18.1 54.75,61.35 54.75,59.55 C18.1
  Bottom Layer w0.4: v2(53.3,61.4) 54.5,62.6 54.5,72.6 54.5,73.474 52.85,75.124 52.85,77.9 R19.2
NetC25_2: C25.2 C26.2 R27.2 R28.1 U5.3 U6.5 | length 23.1
  Top Layer w0.4: C25.2 R27.2 ; U5.3 63.425,53.675 63.425,50.3 ; U6.5 64.264,48 63.464,48.8 R27.2 ; R28.1 72.5,51.3 71.5,50.3 63.425,50.3 ; R27.2 63.425,48.825 63.425,50.3
NetC28_2: C28.2 C29.2 R30.1 U6.3 U6.4 | length 8.4
  Top Layer w0.4: U6.4 U6.3 71.75,48.95 cw(c71.75,48.7) C29.2@72,48.7 ; C29.2 R30.1
NetC31_FILTR+5V_1: C31_FILTR+5V.1 L1_FILTR+5V.1 | length 2.1
  Top Layer w0.5: C31_FILTR+5V.1 63.375,38.25 63.375,36.225 L1_FILTR+5V.1
NetC31_FILTR-5V_1: C31_FILTR-5V.1 L1_FILTR-5V.1 | length 2.1
  Top Layer w0.5: C31_FILTR-5V.1@58.8,38.225 C31_FILTR-5V.1 58.812,38.238 58.812,36.213 L1_FILTR-5V.1
NetD1_2: D1.2 R21.1 U4.12 | length 9.4
  Top Layer w0.4: R21.1 46.7,38.845 47.46,39.605 U4.12 ; 47.535,41.775 D1.2
NetR2_2: R2.2 R4.2 U1.7 | length 4.6
  Top Layer w0.3: U1.7 46.013,65.044 46.3,64.756 R4.2 R2.2
NetR5_2: R5.2 R10.2 U1.5 | length 4.1
  Top Layer w0.3: U1.5 40.6,64.044 41.596,63.047 41.606,63.047 41.9,62.753 R10.2 41.85,62.694 41.85,61.094 R5.2
NetR6_1: R6.1 R11.2 U1.9 | length 6.8
  Top Layer w0.3: R11.2 43.5,66.444 43.9,66.044 U1.9 46.35,66.044 47.6,67.294 R6.1@47.6,67.344
NetR6_2: R6.2 R7.1 R12.2 | length 4.9
  Top Layer w0.4: R6.2 cw(c49.756,67.344) 49.756,67.7 R12.2 53.9,67.7 cw(c53.9,67.6) R7.1@54,67.6
NetR7_2: R7.2 R8.1 U3.2 | length 7.6
  Top Layer w0.4: R7.2 cw(c55.635,67.7) 55.635,67.735 U3.2 59.435,67.735 60.1,68.4 R8.1
NetR8_2: R8.2 R9.1 U3.6 | length 8.4
  Top Layer w0.4: R8.2 61.7,67.3 62.5,66.5 63.632,66.5 U3.6 63.684,66.482 65.782,66.482 R9.1
NetR11_1: R11.1 R14.2 U1.1 | length 4.4
  Top Layer w0.3: U1.1 41.024,66.544 41.024,66.968 41.773,67.716 41.773,68.316 R11.1 R14.2
NetR13_2: R13.2 R15.2 U1.4 | length 11.5
  Top Layer w0.3: R13.2 cw(c37.65,57.875) 36.775,57.875 36.775,63.25 cw(c38.169,63.25) 38.169,64.644 38.591,64.644 38.991,65.044 U1.4
NetR18_2: R18.2 U3.3 | length 6.1
  Top Layer w0.4: R18.2 54.7,64.7 56.465,66.465 U3.3
NetR23_1: R23.1 U8.1 U8.4 | length 16.7
  Top Layer w0.4: U8.1 27.832,54.593 28.657,54.593 29.515,53.735 30.485,53.735 ; U8.4@30.182,52.768 30.257,52.843 30.257,53.507 30.485,53.735 ; R23.1 35.2,61.95 31.25,58 31.25,54.5 30.485,53.735
NetR26_1: R26.1 U5.4 | length 2
  Top Layer w0.4: R26.1 63.375,57.725 63.375,55.975 U5.4
NetR27_1: R27.1 U6.6 | length 2.2
  Top Layer w0.4: R27.1 63.475,47.125 65.425,47.125 U6.6
NetR28_2: R28.2 R29.1 U7.4 | length 3.7
  Top Layer w0.4: R29.1 70.55,57.95 U7.4@70.55,56.4 ; U7.4 72.036,56 72.436,55.6 R28.2
OUT: R9.2 X3.S | length 16.2
  Top Layer w0.3: R9.2 68.26,66.5 ccw(c68.26,69.04) 70.8,69.04 X3.S
RT1: U4.5 X1.17 | length 28
  Top Layer w0.4: U4.5 50,50.6 54.255,46.345 54.255,36.505 51.41,33.66 51.41,31.69 X1.17
RT2: U4.4 X1.18 | length 26
  Top Layer w0.4: U4.4 47.46,52.15 53.655,45.955 53.655,36.905 50.53,33.78 50.53,33.702 50.12,33.292 X1.18
TEC+: U4.9 X1.13 X1.14 | length 16.9
  Top Layer w0.5: U4.9 55.08,30.52 X1.13
TEC-: U4.7 X1.11 X1.12 | length 23.5
  Top Layer w0.5: U4.7 55.414,52.34 56.3,51.454 56.3,46.4 56.007,46.107 56.007,37.225 57.74,35.492 X1.12 X1.11
TEC_CUR_SP1: X1.26
TEC_CUR_SP2: X1.25
TEMP_MEAS: X1.32
TEMP_SP1: X1.27
TEMP_SP2: X1.28
pads on no net: U2.1 U2.5 U2.8 U3.1 U3.5 U3.8 U4.0 U4.1 U4.3 U4.8 U4.10 U4.11 X1.34
copper on no net: | length 35.4
  Top Layer w0.2: 35.51,47.14 35.51,49.26 36.85,50.6 43.25,50.6 43.72,51.07 45.02,51.07 45.33,51.07 46.2,50.2 46.2,49.3 45.43,48.53 45.02,48.53 39.82,48.53 39.15,49.2 37.25,49.2 36.75,48.7 36.75,47.1 36.55,46.9 35.75,46.9 35.51,47.14
  Bottom Layer w0.2: 43.9,49.5 43.9,50.1 44.87,51.07 45.23,51.07 46.1,50.2 46.1,49.4 45.23,48.53 44.87,48.53 43.9,49.5

## Polygon pours and split planes (outlines as drawn)
no net on Bottom Layer "tg" (solid, shelved, pour order 1): 25.5,84.5 25.5,25.5 74.5,25.5 74.5,84.5
GND on Layer 1 "tg" (solid, pour order 0): 25.5,84.5 25.5,20.5 74.5,20.5 74.5,84.5
GND on Layer 2 "tg" (solid, pour order 2): 25.5,84.5 25.5,20.5 74.5,20.5 74.5,84.5

## Silkscreen, mask and mechanical layers (free items; w line width, h text height)
Top Solder:
  lines w0.2: 48.4,61.7 48.6,61.5 ; 48.83,54.47 48.83,54.88 ; 51.37,54.57 51.37,54.88 ; 35.51,47.14 35.51,49.26 36.85,50.6 43.25,50.6 43.72,51.07 45.02,51.07 45.33,51.07 46.2,50.2 46.2,49.3 45.43,48.53 45.02,48.53 39.82,48.53 39.15,49.2 37.25,49.2 36.75,48.7 36.75,47.1 36.55,46.9 35.75,46.9 35.51,47.14
Bottom Solder:
  lines w0.2: 48.83,54.67 48.83,55.03 ; 51.37,54.67 51.37,55.03 ; 43.9,49.5 43.9,50.1 44.87,51.07 45.23,51.07 46.1,50.2 46.1,49.4 45.23,48.53 44.87,48.53 43.9,49.5
  text "OUT" at 69.954,72.154 h1.52 r270
  text "GAIN" at 28.654,70.454 h1.52 r270
Board:
  the board outline again, w0.1
Mechanical 8:
  circle w0.1: c50.1,50.05 r12.5
  circle w0.1: c68,17 r2
  circle w0.1: c32.499,17.018 r2
  circle w0.1: c32.499,83.018 r2
  circle w0.1: c68,83 r2
  lines w0.1: 49.6,49.9 50.6,49.9 ; 50.1,49.4 50.1,50.4 ; 15,10 85,10 85,90 15,90 15,10

## Text inside footprints (layer, text, board x,y; h text height)
U4: Mechanical 14 "1" at 45.625,47.05 h1.3 r90; Top Overlay "CASE" at 53.35,55.475 h0.8 r90